# Allegro board sophum_flow_v1.brd
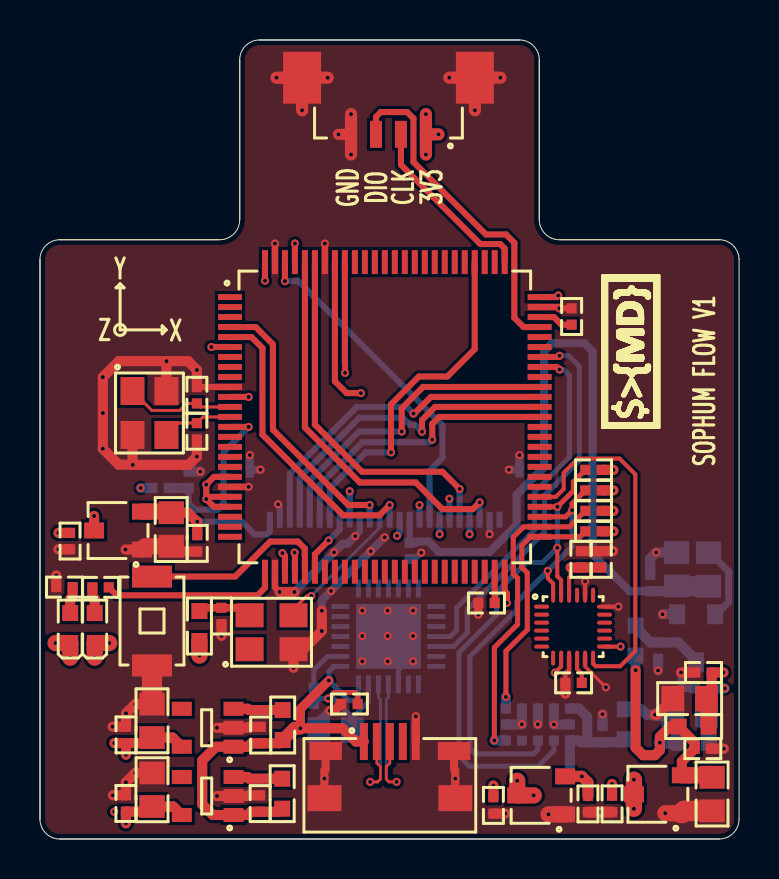
[diagram p0: board, top side]
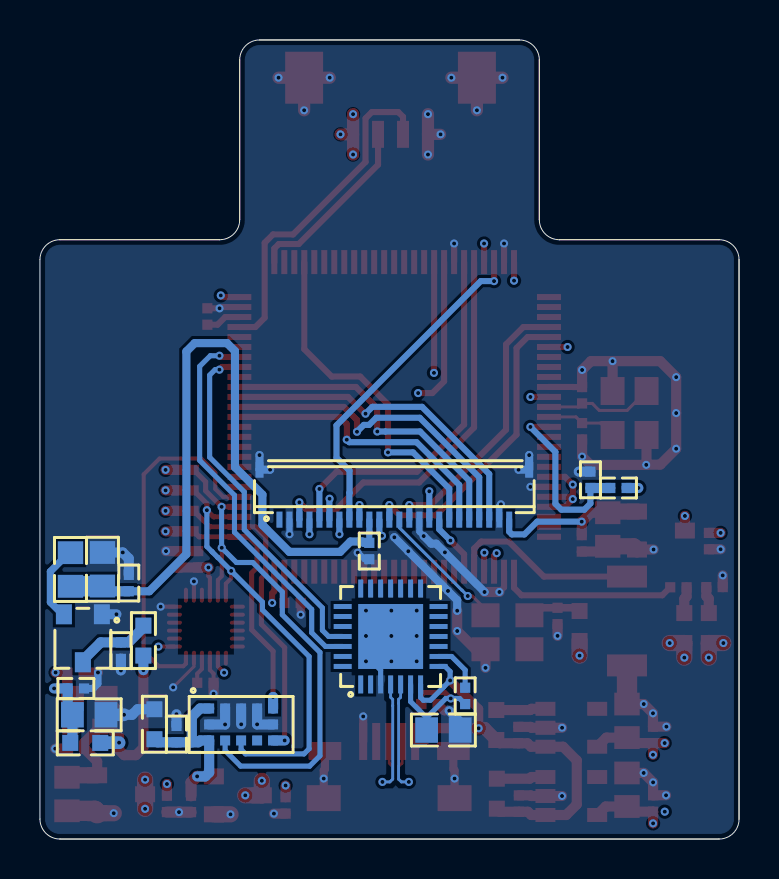
[diagram p1: board, bottom side, seen from below]

Outline 35 x 40 mm; copper layers: TOP, GND02, PWR03, BOTTOM. Coordinates in mm from the lower left corner of the outline.
Outline path: 0,29 0,1 ; 0,29 arc(0.29,29.71) 1,30 ; 0,29 0,1 ; 0,1 arc(0.29,0.29) 1,0 ; 1,30 9,30 ; 1,30 9,30 ; 9,30 arc(9.71,30.29) 10,31 ; 1,0 34,0 ; 1,0 34,0 ; 34,0 arc(34.71,0.29) 35,1 35,29 arc(34.71,29.71) 34,30 ; 10,39 10,31 ; 10,39 arc(10.29,39.71) 11,40 ; 10,39 10,31 ; 11,40 24,40 ; 11,40 24,40 ; 24,40 arc(24.71,39.71) 25,39 ; 25,39 25,31 ; 25,39 25,31 ; 25,31 arc(25.29,30.29) 26,30 ; 26,30 34,30 ; 26,30 34,30

## Design rules (mm)
net group DIFFPAIR0: nets N1010161 N1010165
net group DIFFPAIR1: nets N02244 N02266

## Placement (name value [footprint] x y rotation side)
C1  1uF  [C0402]  22.7 1.68 270 top
C2  1uF  [C0402]  27.44 1.76 270 top
C3  0.1uF  [C0402]  28.16 5.25 90 bottom
C4  4.7uF  [C0603]  29.27 5.75 90 bottom
C5  0.1uF  [C0402]  28.1 14 90 top
C6  0.1uF  [C0402]  27.08 14 90 top
C7  0.1uF  [C0402]  7.44 17.98 90 bottom
C8  0.1uF  [C0402]  26.72 7.82 180 top
C9  0.1uF  [C0402]  22.36 11.82 180 top
C10  0.1uF  [C0402]  26.62 26.16 90 top
C11  22pF  [C0402]  7.86 22.21 90 top
C12  22pF  [C0402]  7.86 20.41 270 top
C13  1uF  [C0402]  15.5 6.76 180 top
C14  10uF  [C0805]  14.8 5.46 180 bottom
C15  0.1uF  [C0402]  11.05 5.2 90 top
C16  0.1uF  [C0402]  4.31 5.21 90 top
C17  10uF  [C0805]  5.61 5.92 90 top
C18  0.1uF  [C0402]  11.02 1.78 90 top
C19  10uF  [C0805]  5.61 2.47 90 top
C20  0.1uF  [C0402]  4.3 1.78 90 top
C21  10uF  [C0805]  31.87 13.51 90 bottom
C22  0.1uF  [C0402]  30.55 12.81 90 bottom
C23  1uF  [C0402]  30.95 9.43 270 bottom
C24  1uF  [C0402]  18.51 14.42 270 bottom
C25  1uF  [C0402]  1.51 14.91 270 top
C26  0.1uF  [C0402]  9.09 11.17 270 top
C27  10uF  [C0805]  6.57 15.49 270 top
C28  0.1uF  [C0402]  7.88 14.8 270 top
C29  1uF  [C0402]  28.64 1.76 270 top
C30  10uF  [C0805]  32.53 7.03 180 top
C31  0.1uF  [C0402]  33.22 8.34 180 top
C32  10uF  [C0805]  33.65 2.25 270 top
C33  0.1uF  [C0402]  33.19 4.52 0 top
C34  10uF  [C0805]  32.53 6.22 180 bottom
C35  0.1uF  [C0402]  33.2 7.54 180 bottom
J1  DEBUG  [DBAR-4-1R25-SM]  17.45 36.69 180 top
J2  USB_MICRO  [USB-MICRO-5-SM]  17.52 3.23 0 top
L1  3.3uH  [L0603]  29.82 9.93 90 bottom
L2  FB-600R  [L0805]  33.47 13.5 270 bottom
L3  3.3uH  [L0603]  7.98 10.66 270 top
L4  3.3uH  [L0603]  32.73 5.63 0 top
L5  3.3uH  [L0603]  32.73 4.81 0 bottom
LED1  POWER  [LED0603]  1.52 10.56 90 top
LED2  STATE  [LED0603]  2.74 10.56 90 top
R1  10K  [R0402]  27.72 15.4 0 top
R2  10K  [R0402]  27.72 16.43 0 top
R3  10K  [R0402]  27.72 17.45 0 top
R4  10K  [R0402]  27.72 18.48 0 top
R5  10K  [R0402]  6.04 17.57 0 bottom
R6  2K  [R0402]  1.23 12.61 180 top
R7  2K  [R0402]  3.04 12.6 0 top
R8  10K  [R0402]  13.71 7.17 90 bottom
R9  500K  [R0603]  12.15 5.71 90 top
R10  500K  [R0603]  12.13 2.27 90 top
SW1  BUTTON  [SW-2-2R00X1R10-SM]  5.61 10.91 90 top
U1  STM32F407VGT6  [LQFP-100-1R20X0R30]  17.27 21.13 270 top
U2  XC6206P282MR  [SOT-23-3-1R00X0R80]  25.09 2.19 180 top
U3  ICM-20948  [QFN-24-0R75X0R20]  26.69 10.63 0 top
U4  VL53L0-1X  [LGA-12-0R50X0R50]  24.93 5.74 180 bottom
U5  CP2102-GM  [QFN-28-0R90X0R25]  17.44 10.14 90 bottom
U6  SPX3819M5-L-3-3  [SOT-23-3-1R00X0R70]  8.4 5.57 90 top
U7  SPX3819M5-L-1-8  [SOT-23-3-1R00X0R70]  8.4 2.15 90 top
U8  XC6206P152MR  [SOT-23-3-1R00X0R80]  32.85 10.05 270 bottom
U9  OV-SENSOR  [FPC-24-0R80X0R30]  17.26 17.24 0 bottom
U10  XC6206P282MR  [SOT-23-3-1R00X0R80]  3.91 15.44 180 top
U11  XC6206P282MR  [SOT-23-3-1R00X0R80]  30.94 2.24 180 top
X1  8Mhz  [XTAL-4-3R20X2R50-SM]  5.48 21.33 270 top
X2  24Mhz  [XTAL-4-3R20X2R50-SM]  11.59 10.35 0 top

## Library data of the parts
C1-C35 = CAPACITOR-NON-POL
J1 = DBAR-4
J2 = USB_MICRO
L1 L3-L5 = INDUCTOR
L2 = MAGNETIC-BEAD
LED1 LED2 = LED
R1-R10 = RESISTOR
SW1 = BUTTON
U1 = STM32F407VGT6
U2 U10 U11 = XC6206P282MR
U3 = ICM-20948
U4 = VL53L0-1X
U5 = CP2102
U6 = SPX3819M5-L-3-3
U7 = SPX3819M5-L-1-8
U8 = XC6206P152MR
U9 = OV-SENSOR
X1 = XTAL-CRY
X2 = XTAL-OSC

## Footprints (pads in the part's own frame, mm; a bottom-side part is the same pattern mirrored in y, then rotated)
C0402
  rect 0.51x0.51 smd: 1(-0.41,0) 2(0.41,0)
C0603
  rect 0.8x0.8 smd: 1(-0.75,0) 2(0.75,0)
C0805
  rect 1.14x1.27 smd: 1(-0.84,0) 2(0.84,0)
DBAR-4-1R25-SM
  rect 0.6x1.35 smd: 1(-1.875,1.418) 2(-0.625,1.418) 3(0.625,1.418) 4(1.875,1.418)
  rect 1.9x2.6 smd: 5(-4.325,-1.418) 6(4.325,-1.418)
FPC-24-0R80X0R30
  rect 0.3x0.8 smd: 1(5.75,1.25) 2(5.25,1.25) 3(4.75,1.25) 4(4.25,1.25) 5(3.75,1.25) 6(3.25,1.25) 7(2.75,1.25) 8(2.25,1.25) 9(1.75,1.25) 10(1.25,1.25) 11(0.75,1.25) 12(0.25,1.25) 13(-0.25,1.25) 14(-0.75,1.25) 15(-1.25,1.25) 16(-1.75,1.25) 17(-2.25,1.25) 18(-2.75,1.25) 19(-3.25,1.25) 20(-3.75,1.25) 21(-4.25,1.25) 22(-4.75,1.25) 23(-5.25,1.25) 24(-5.75,1.25)
  rect 0.4x0.8 smd: 25(-6.75,-1.25) 26(6.75,-1.25)
L0603
  rect 0.8x0.8 smd: 1(-0.75,0) 2(0.75,0)
L0805
  rect 1.14x1.27 smd: 1(-0.84,0) 2(0.84,0)
LED0603
  rect 0.8x0.8 smd: 1(-0.75,0) 2(0.75,0)
LGA-12-0R50X0R50
  rect 0.5x0.5 smd: 1(-1.6,0.8) 2(-0.8,0.8) 3(0,0.8) 4(0.8,0.8) 5(1.6,0.8) 6(1.6,0) 7(1.6,-0.8) 8(0.8,-0.8) 9(0,-0.8) 10(-0.8,-0.8) 11(-1.6,-0.8) 12(-1.6,0)
LQFP-100-1R20X0R30
  rect 0.3x1.2 smd: 1(-6,-7.75) 2(-5.5,-7.75) 3(-5,-7.75) 4(-4.5,-7.75) 5(-4,-7.75) 6(-3.5,-7.75) 7(-3,-7.75) 8(-2.5,-7.75) 9(-2,-7.75) 10(-1.5,-7.75) 11(-1,-7.75) 12(-0.5,-7.75) 13(0,-7.75) 14(0.5,-7.75) 15(1,-7.75) 16(1.5,-7.75) 17(2,-7.75) 18(2.5,-7.75) 19(3,-7.75) 20(3.5,-7.75) 21(4,-7.75) 22(4.5,-7.75) 23(5,-7.75) 24(5.5,-7.75) 25(6,-7.75) 51(6,7.75) 52(5.5,7.75) 53(5,7.75) 54(4.5,7.75) 55(4,7.75) 56(3.5,7.75) 57(3,7.75) 58(2.5,7.75) 59(2,7.75) 60(1.5,7.75) 61(1,7.75) 62(0.5,7.75) 63(0,7.75) 64(-0.5,7.75) 65(-1,7.75) 66(-1.5,7.75) 67(-2,7.75) 68(-2.5,7.75) 69(-3,7.75) 70(-3.5,7.75) 71(-4,7.75) 72(-4.5,7.75) 73(-5,7.75) 74(-5.5,7.75) 75(-6,7.75)
  rect 1.2x0.3 smd: 26(7.75,-6) 27(7.75,-5.5) 28(7.75,-5) 29(7.75,-4.5) 30(7.75,-4) 31(7.75,-3.5) 32(7.75,-3) 33(7.75,-2.5) 34(7.75,-2) 35(7.75,-1.5) 36(7.75,-1) 37(7.75,-0.5) 38(7.75,0) 39(7.75,0.5) 40(7.75,1) 41(7.75,1.5) 42(7.75,2) 43(7.75,2.5) 44(7.75,3) 45(7.75,3.5) 46(7.75,4) 47(7.75,4.5) 48(7.75,5) 49(7.75,5.5) 50(7.75,6) 76(-7.75,6) 77(-7.75,5.5) 78(-7.75,5) 79(-7.75,4.5) 80(-7.75,4) 81(-7.75,3.5) 82(-7.75,3) 83(-7.75,2.5) 84(-7.75,2) 85(-7.75,1.5) 86(-7.75,1) 87(-7.75,0.5) 88(-7.75,0) 89(-7.75,-0.5) 90(-7.75,-1) 91(-7.75,-1.5) 92(-7.75,-2) 93(-7.75,-2.5) 94(-7.75,-3) 95(-7.75,-3.5) 96(-7.75,-4) 97(-7.75,-4.5) 98(-7.75,-5) 99(-7.75,-5.5) 100(-7.75,-6)
QFN-24-0R75X0R20
  oval 0.75x0.2 smd: 1(-1.575,1) 2(-1.575,0.6) 3(-1.575,0.2) 4(-1.575,-0.2) 5(-1.575,-0.6) 6(-1.575,-1) 13(1.575,-1) 14(1.575,-0.6) 15(1.575,-0.2) 16(1.575,0.2) 17(1.575,0.6) 18(1.575,1)
  oval 0.2x0.75 smd: 7(-1,-1.575) 8(-0.6,-1.575) 9(-0.2,-1.575) 10(0.2,-1.575) 11(0.6,-1.575) 12(1,-1.575) 19(1,1.575) 20(0.6,1.575) 21(0.2,1.575) 22(-0.2,1.575) 23(-0.6,1.575) 24(-1,1.575)
QFN-28-0R90X0R25
  rect 0.9x0.25 smd: 1(-2.4,1.5) 2(-2.4,1) 3(-2.4,0.5) 4(-2.4,0) 5(-2.4,-0.5) 6(-2.4,-1) 7(-2.4,-1.5) 15(2.4,-1.5) 16(2.4,-1) 17(2.4,-0.5) 18(2.4,0) 19(2.4,0.5) 20(2.4,1) 21(2.4,1.5)
  rect 0.25x0.9 smd: 8(-1.5,-2.4) 9(-1,-2.4) 10(-0.5,-2.4) 11(0,-2.4) 12(0.5,-2.4) 13(1,-2.4) 14(1.5,-2.4) 22(1.5,2.4) 23(1,2.4) 24(0.5,2.4) 25(0,2.4) 26(-0.5,2.4) 27(-1,2.4) 28(-1.5,2.4)
  rect 3.25x3.25 smd: 29(0,0)
R0402
  rect 0.51x0.51 smd: 1(-0.41,0) 2(0.41,0)
R0603
  rect 0.8x0.8 smd: 1(-0.75,0) 2(0.75,0)
SOT-23-3-1R00X0R70
  rect 0.7x1 smd: 1(-0.95,-1.295) 2(0,-1.295) 3(0.95,-1.295) 4(0.95,1.295) 5(-0.95,1.295)
SOT-23-3-1R00X0R80
  rect 1x0.8 smd: 1(-1.2,0.95) 2(-1.2,-0.95) 3(1.2,0)
SW-2-2R00X1R10-SM
  rect 1.1x2 smd: 1(-2.225,0) 2(2.225,0)
USB-MICRO-5-SM
  rect 0.4x1.85 smd: 1(-1.3,1.655) 2(-0.65,1.655) 3(0,1.655) 4(0.65,1.655) 5(1.3,1.655)
  rect 1.63x0.9 smd: 6(-3.215,1.18) 7(3.215,1.18)
  rect 1.7x1.3 smd: 8(-3.275,-1.18) 9(3.275,-1.18)
XTAL-4-3R20X2R50-SM
  rect 1.4x1.2 smd: 1(-1.1,-0.85) 2(1.1,-0.85) 3(1.1,0.85) 4(-1.1,0.85)

## Nets
GND: C1.2 C2.2 C3.2 C4.2 C5.2 C6.2 C7.2 C8.2 C9.2 C10.2 C11.2 C12.2 C13.2 C14.2 C15.2 C16.2 C17.2 C18.2 C19.2 C20.2 C21.2 C22.2 C23.2 C24.2 C25.2 C26.2 C27.2 C28.2 C29.2 C30.2 C31.2 C32.2 C33.2 C34.2 C35.2 J1.4 J1.5 J1.6 J2.5(GND) J2.6(SH1) J2.7(SH2) J2.8(SH3) J2.9(SH4) R6.2 SW1.1(P1) U1.10(VSS_5) U1.20(VREF-) U1.27(VSS_4) U1.74(VSS_2) U1.94(BOOT0/VPP) U1.99(VSS_3) U2.1(VSS) U3.9(SDO/AD0) U3.11(FSYNC) U3.18(GND) U3.20(RESV1) U4.2(AVSSVCSEL) U4.3(GND) U4.4(GND2) U4.6(GND3) U4.12(GND4) U5.3(GND#3) U5.29(GND#29) U6.2(GND) U7.2(GND) U8.1(VSS) U9.2(AGND) U9.15(DGND#15) U9.23(AF-GND) U9.25(DGND#25) U9.26(DGND#26) U10.1(VSS) U11.1(VSS) X1.2(GND#2) X1.4(GND#4) X2.2(GND)
VCC_1V8: C5.1 C6.1 C19.1 C20.1 R1.2 R2.2 R3.2 R4.2 U3.8(VDDIO) U3.13(VDD) U3.22(NCS) U7.5(VOUT)
VCC_2V8: C2.1 C3.1 C4.1 U2.2(VOUT) U4.1(AVDDVCSEL) U4.11(AVDD)
VCC_3V3: C1.1 C16.1 C17.1 C25.1 C29.1 J1.1 L3.2 LED1.1 LED2.1 R5.1 U1.6(VBAT) U1.11(VDD_5) U1.19(VDD) U1.21(VREF+) U1.22(VDDA) U1.28(VDD_4) U1.50(VDD_1) U1.75(VDD_2) U1.100(VDD_3) U2.3(VIN) U6.5(VOUT) U10.3(VIN) U11.3(VIN)
VCC_5V0: C15.1 C18.1 J2.1(VCC) R9.1 R10.1 U5.7(REGIN) U5.8(VBUS) U6.1(VIN) U7.1(VIN)
KEY: SW1.2(P2) U1.30(PA5/SPI1_SCK/OTG_HS_ULPI_CK/ADC)
LED: R7.2 U1.26(PA3/USART2_RX/OTG_HS_ULPI_D0/AD)
OV_AF_VCC: C27.1 C28.1 U9.24(AF-VCC) U10.2(VOUT)
OV_AVDD: C30.1 C31.1 L4.2 U9.4(AVDD)
OV_DOVDD: C34.1 C35.1 L5.2 U9.11(DOVDD)
OV_VCC_1V5: C21.1 C22.1 C24.1 L2.2 U9.10(DVDD)
OV_VCC_2V8: C32.1 C33.1 L1.1 L4.1 L5.1 U11.2(VOUT)
OV_XCLK: U9.13(XCLK) X2.3(OUT)
SENSOR_IMU_INT: U1.55(FSMC_D13/USART3_TX/PD8) U3.12(INT1)
SENSOR_OV_D0: U1.63(I2S2_MCK/SDIO_D6/USART6_TX/DCMI) U9.19(Y2)
SENSOR_OV_D1: U1.64(I2S3_MCK/SDIO_D7/USART6_RX/DCMI) U9.21(Y3)
SENSOR_OV_D2: U1.65(SDIO_D0/DCMI_D2/PC8) U9.22(Y4)
SENSOR_OV_D3: U1.66(I2S_CKIN/MCO2/SDIO_D1/I2C3_SDA/) U9.20(Y5)
SENSOR_OV_D4: U1.79(UART4_RX/SPI3_MISO/SDIO_D3/DCMI) U9.18(Y6)
SENSOR_OV_D5: U1.92(PB6/I2C1_SCL/CAN2_TX/OTG_FS_INT) U9.16(Y7)
SENSOR_OV_D6: U1.4(TRACED2/FSMC_A21/DCMI_D6/PE5) U9.14(Y8)
SENSOR_OV_D7: U1.5(TRACED3/FSMC_A22/DCMI_D7/PE6) U9.12(Y9)
SENSOR_OV_HREF: U1.29(PA4/DCMI_HSYNC/OTG_HS_SOF/I2S3_) U9.9(HREF)
SENSOR_OV_PCLK: U1.31(PA6/SPI1_MISO/DCMI_PIXCLK/ADC12) U9.17(PCLK)
SENSOR_OV_PWDN: U1.98(FSMC_NBL1/DCMI_D3/PE1) U9.8(PWDN)
SENSOR_OV_RESET: U1.97(FSMC_NBL0/DCMI_D2/PE0) U9.6(RESET)
SENSOR_OV_SCL: U1.95(PB8/SDIO_D4/DCMI_D6/OTG_FS_SCL/) U9.5(SIO_C)
SENSOR_OV_SDA: U1.96(PB9/I2S2_WS/OTG_FS_SDA/SDIO_D5/) U9.3(SIO_D)
SENSOR_OV_VSYNC: U1.93(PB7/I2C1_SDA/FSMC_NL/DCMI_VSYNC) U9.7(VSYNC)
SENSOR_SCL: R4.1 U1.54(PB15/SPI2_MOSI/I2S2_SD/OTG_HS_D) U3.23(SCL/SCLK) U4.10(SCL)
SENSOR_SDA: R3.1 U1.53(PB14/SPI2_MISO/OTG_HS_DMUSART3_) U3.24(SDA/SDI) U4.9(SDA)
SENSOR_VL_INT: R2.1 U1.52(PB13/SPI2_SCK/I2S2_CK/CAN2_TX/E) U4.7(GPIO1)
SENSOR_VL_XSH: R1.1 U1.51(PB12/I2S2_WS/I2S2_SMBA/CAN2_RX/) U4.5(XSHUT)
SWCLK: J1.2 U1.76(PA14/JTCK/SWCLK)
SWDIO: J1.3 U1.72(PA13/JTMS/SWDIO)
USART1_RX: U1.69(PA10/USART1_RX/OTG_FS_ID/DCMI_D) U5.26(TXD)
USART1_TX: U1.68(PA9/USART1_TX/I2C3_SMBA/DCMI_D0) U5.25(RXD)
N01190: C7.1 R5.2 U1.14(NRST)
N01562: C10.1 U1.73(VCAP2)
N01566: C9.1 U1.49(VCAP1)
N02244: C11.1 U1.12(PH0/OSC_IN) X1.1(OUT1)
N02266: C12.1 U1.13(PH1/OSC_OUT) X1.3(OUT2)
N920628: C8.1 U3.10(REGOUT)
N1008580: C26.1 L3.1 X2.4(VDD)
N1008850: C23.1 L1.2 U8.3(VIN)
N1009244: L2.1 U8.2(VOUT)
N1010161: J2.2(D-) U5.5(D-)
N1010165: J2.3(D+) U5.4(D+)
N1010307: R8.2 U5.9(R\S\T\)
N1010387: C13.1 C14.1 R8.1 U5.6(VDD)
N1014561: LED2.2 R7.1
N1015275: LED1.2 R6.1
N1041543: R10.2 U7.3(EN)
N1044127: R9.2 U6.3(EN)

Pads without a net: J2 4; U1 1 2 3 7 8 9 15 16 17 18 23 24 25 32 33 34 35 36 37 38 39 40 41 42 43 44 45 46 47 48 56 57 58 59 60 61 62 67 70 71 77 78 80 81 82 83 84 85 86 87 88 89 90 91; U3 1 2 3 4 5 6 7 14 15 16 17 19 21; U4 8; U5 1 2 10 11 12 13 14 15 16 17 18 19 20 21 22 23 24 27 28; U6 4; U7 4; U9 1; X2 1

## Via types
v1: diameter 0.406, hole 0.203, TOP to BOTTOM, 161 vias

## Routing (per net, layer and track width the routed paths; a pad name or vN(x,y) marks a point on that pad's centre or on a via; arc(x,y) is an arc through that point)
GND: length 110.9
  TOP w0.152: v1(28.33,7.59) 27.29,8.63 U3.11
  TOP w0.203: U3.9 26.49,8.46 26.31,8.28 C8.2 ; U3.20 v1(27.29,12.9) ; U3.18 v1(28.96,11.63)
  TOP w0.305: C11.2 8.32,22.62 8.32,22.63 U1.10 ; v1(12,12.37) 11.77,12.6 U1.27 ; C10.2 v1(26.01,26.57) 25.94,26.63 U1.74 ; U1.99 v1(11.77,29.81) ; U1.20 v1(10.45,17.63) ; U1.94 v1(14.27,29.81)
  TOP w0.406: J2.8 v1(14.24,3.03) 14.24,3.43 14.3,3.49 J2.6 ; J2.7 20.73,3.49 20.79,3.43 v1(20.79,3.03) J2.9 ; J2.5 v1(18.82,6.14) ; C9.2 v1(21.95,11.23)
  TOP w0.457: C13.2 14.75,6.42 v1(14.51,6.42)
  TOP w0.508: v1(12.69,8.57) X2.2 13.2,9.5 v1(14.11,10.41) v1(14.11,11.43) ; C31.2 v1(32.1,8.34) ; v1(8.86,2.15) U7.2 10.4,2.15 10.43,2.19 C18.2 ; v1(3.64,5.62) C16.2 v1(4.31,6.3) v1(4.77,6.76) C17.2 ; C26.2 v1(9.09,10.17) ; U10.1 v1(4.28,14.49) ; v1(8.86,5.57) U6.2 10.39,5.57 10.44,5.61 C15.2 ; C1.2 v1(23.29,1.27) ; C27.2 6.84,14.39 C28.2 ; v1(12.74,12.37) v1(12,12.37) ; v1(6.33,23.92) 7.42,23.92 v1(7.86,23.48) C11.2 ; v1(6.33,23.92) 3.95,23.92 v1(3.15,23.12) v1(3.15,21.32) v1(3.15,19.54) 3.94,18.74 4.63,18.74 ; v1(6.33,23.92) 6.33,23.86 X1.4 ; v1(3.66,2.19) C20.2 v1(4.3,2.84) v1(4.77,3.31) C19.2 ; v1(28.69,14.41) C5.2 C6.2 ; C8.2 v1(26.31,7.27) ; v1(30.79,6.22) 30.88,6.22 C30.2 ; R6.2 v1(0.82,13.2) ; 4.63,18.74 v1(4.65,18.73) 7.44,18.73 v1(7.86,19.15) C12.2 ; 4.63,18.74 X1.2 ; C25.2 v1(0.92,14.5) ; C33.2 v1(34.24,4.52)
  TOP w0.559: C2.2 v1(28.04,1.35) 28.04,1.35 C29.2 ; J1.4 v1(14.94,35.28)
  TOP w0.61: v1(15.57,34.26) J1.4 v1(15.57,36.29) ; J1.5 v1(21.77,36.48) ; J1.5 v1(23.05,38.11) ; J1.5 v1(20.49,38.11) ; J1.6 v1(13.12,36.48) ; J1.6 v1(14.4,38.11) ; J1.6 v1(11.84,38.11)
  TOP w0.813: U11.1 v1(31.31,1.29) ; U10.1 5.27,14.65 C27.2 ; U2.1 v1(25.46,1.24)
  TOP w1.016: C32.2 32.26,1.41 U11.1 ; C17.2 SW1.1
  BOTTOM w0.152: v1(24.93,5.74) 24.93,5.75 ; v1(25.73,5.74) 25.73,5.74
  BOTTOM w0.254: U5.3 17.94,8.46 18.38,8.9 v1(18.68,8.9)
  BOTTOM w0.305: U9.15 16.01,15.39 v1(15.79,15.16) ; U9.2 v1(22.51,15.26) ; C24.2 18.75,14.01 19.07,14.33 v1(19.09,14.33) ; U9.23 12.01,16.67 v1(11.92,16.76) ; v1(24.13,5.74) 24.12,5.74
  BOTTOM w0.356: C35.2 32.33,7.54 32.1,7.78 32.1,8.34 v1(32.1,8.34)
  BOTTOM w0.406: v1(23.48,18.49) U9.26 v1(24.01,19.22) ; v1(17.26,15.11) v1(16.56,14.41) v1(14.57,12.42) 14.11,11.96 v1(14.11,11.43) ; v1(10.51,19.22) U9.25 v1(11.04,18.49) ; v1(15.79,15.16) 15.41,14.79 15.16,14.79 v1(14.73,14.35) v1(12.74,12.37)
  BOTTOM w0.457: v1(14.51,6.42) 13.96,5.87 C14.2
  BOTTOM w0.508: U4.12 v1(25.73,5.74) ; 24.93,5.75 U4.3 ; C7.2 v1(8.03,18.39) ; U4.4 v1(24.13,5.74) ; 25.73,5.74 U4.2 ; C22.2 30.55,14.04 v1(30.85,14.35) C21.2 ; U8.1 v1(31.17,11.25) ; C3.2 v1(28.16,6.25) ; 24.12,5.74 U4.6 ; C4.2 30.11,6.5 30.39,6.22 v1(30.79,6.22) ; C23.2 v1(30.95,8.44)
  BOTTOM w0.635: C34.2 v1(30.79,6.22)
  vias: v1(16.14,11.44) v1(16.14,10.17) v1(16.14,8.9) v1(17.41,11.44) v1(17.41,10.17) v1(17.41,8.9) v1(18.68,11.44) v1(18.68,10.17)
VCC_1V8: length 67.4
  TOP w0.203: U3.13 v1(29.07,9.63) ; v1(26.57,13.59) 26.57,13.16 26.49,13.09 U3.22 ; v1(25.78,8.33) 26.09,8.64 U3.8
  TOP w0.508: R3.2 v1(28.71,17.45) ; R4.2 v1(28.71,18.48) ; R2.2 v1(28.71,16.43) ; C5.1 C6.1 v1(26.57,13.59) ; U7.5 6.68,1.63 C19.1 5.35,1.37 C20.1 v1(4.3,0.79) ; R1.2 v1(28.71,15.4)
  PWR03 w0.508: v1(28.71,18.48) v1(28.71,17.45) v1(28.71,16.43) v1(28.71,15.4) 28.28,14.97 27.07,14.97 26.57,14.46 v1(26.57,13.59) 28.94,13.59 29.93,12.6 29.93,10.49 v1(29.07,9.63) 29.07,9.05 28.35,8.33 v1(25.78,8.33) 25.2,8.33 24.67,7.8 24.67,7.09 25.25,6.5 26.31,6.5 29.12,3.7 29.96,3.7 30.64,3.01 30.64,1.17 30.06,0.59 5.08,0.59 4.89,0.79 v1(4.3,0.79) v1(3.72,1.37)
VCC_2V8: length 9.4
  TOP w0.559: U2.2 v1(27.13,3.14) 27.44,2.83 C2.1
  BOTTOM w0.508: C4.1 29.12,4.84 C3.1 27.4,4.84 ; U4.1 26.98,6.54 27.4,6.12 27.4,4.84 ; 27.4,4.84 27.07,4.84 26.98,4.94 U4.11 26.53,3.33 26.72,3.14 v1(27.13,3.14)
VCC_3V3: length 27.7
  TOP w0.305: U1.21 8.44,17.13 v1(8.32,17.02) ; v1(23.38,11.82) 23.38,12.3 23.27,12.41 U1.50 ; v1(8.32,17.02) 8.71,16.63 U1.22 ; v1(8.32,17.02) v1(8.32,17.74) 8.71,18.13 U1.19 ; U1.6 v1(8.59,24.63) ; U1.75 25.86,27.13 25.94,27.21 v1(25.95,27.21) ; U1.100 v1(11.27,27.95) ; v1(12.14,14.31) 12.14,14.31 12.27,14.18 U1.28 ; U1.11 v1(10.45,22.13)
  TOP w0.508: C16.1 v1(4.31,4.22) ; C16.1 v1(3.72,4.8) ; C16.1 5.34,4.8 C17.1 6.64,5.08 U6.5 ; U10.3 v1(2.71,16.17) ; C1.1 v1(22.7,2.68) ; C25.1 v1(0.92,15.32) ; C29.1 v1(28.64,2.76)
  TOP w0.61: J1.1 v1(19.32,36.29) ; J1.1 v1(19.95,35.28) ; J1.1 v1(19.32,34.26)
  TOP w0.813: v1(2.74,9.08) LED2.1 v1(3.47,9.81) ; v1(24.72,2.19) U2.3 v1(23.89,2.92) ; L3.2 v1(7.98,9.18) ; v1(0.78,9.81) LED1.1 v1(1.52,9.08) ; v1(29.74,1.51) U11.3 v1(29.74,2.97)
  BOTTOM w0.508: R5.1 v1(5.04,17.57)
VCC_5V0: length 22.3
  TOP w0.457: v1(13.04,5.54) 13.04,6.51 v1(14.46,7.94)
  TOP w0.508: v1(13.04,5.54) 15.15,5.54 15.81,4.88 J2.1 ; R9.1 11.99,4.79 C15.1 10.59,4.79 10.42,4.62 U6.1 8.81,4.62 8.12,3.93 8.12,1.73 8.65,1.2 U7.1 10.41,1.2 10.57,1.37 C18.1 11.97,1.37 R10.1
  TOP w0.635: R9.1 12.74,5.54 v1(13.04,5.54)
  BOTTOM w0.254: U5.7 15.94,7.09 15.8,6.95 15.45,6.95 14.79,7.61 14.79,7.61 v1(14.46,7.94) 14.46,8.39 14.72,8.64 U5.8
KEY: length 9.7
  TOP w0.305: SW1.2 9.77,13.14 11.53,14.89 12.9,14.89 12.95,14.85 12.96,14.85 13.26,14.55 13.26,14.54 13.26,14.54 13.26,14.19 13.27,14.18 U1.30
LED: length 8.9
  TOP w0.305: U1.26 11.27,12.58 10.89,12.2 3.85,12.2 R7.2
OV_AF_VCC: length 8.2
  TOP w0.508: C27.1 7.41,16.33 7.86,15.89 v1(7.88,15.89) C28.1
  TOP w0.813: U10.2 6.51,16.39 C27.1
  BOTTOM w0.305: v1(7.88,15.89) 10.11,15.89 10.75,15.25 11.37,15.25 11.51,15.39 U9.24
OV_AVDD: length 28.9
  TOP w0.508: C30.1 33.63,7.3 C31.1 v1(34.22,8.34)
  TOP w0.813: L4.2 33.48,6.92 C30.1
  PWR03 w0.508: v1(34.22,8.34) 34.22,16.91 30.89,20.24 26.49,20.24 v1(21.51,15.26)
  BOTTOM w0.305: U9.4 v1(21.51,15.26)
OV_DOVDD: length 34.8
  PWR03 w0.457: v1(34.29,7.54) 33.73,7.54 33.19,8.09 33.19,16.26 30.12,19.32 27.4,19.32 24.75,16.68 24.75,15.48 22.61,13.34 19.05,13.34 17.88,14.51 v1(17.88,15.18)
  BOTTOM w0.305: U9.11 18.01,15.31 v1(17.88,15.18)
  BOTTOM w0.508: L5.2 33.37,4.92 C34.1 33.61,6.46 C35.1 v1(34.29,7.54)
OV_VCC_1V5: length 36.2
  BOTTOM w0.305: C24.1 18.51,15.38 18.51,15.39 U9.10
  BOTTOM w0.406: C22.1 29.52,12.4 27.67,14.26 27.67,24.41 27.25,24.82 25.63,24.82 25.24,24.43 25.24,18.61 23.86,17.24 23.86,15.73 22.51,14.37 19.97,14.37 19.45,14.89 18.86,14.89 18.79,14.83 C24.1
  BOTTOM w0.508: C21.1 31.61,12.4 C22.1
  BOTTOM w1.016: C21.1 31.88,12.66 L2.2
OV_VCC_2V8: length 13.4
  TOP w0.508: U11.2 32.14,3.88 C33.1 32.78,4.83 L4.1 31.55,5.63 31.04,5.12 v1(31.04,4.82) 31.04,4.45 30.78,4.2 30.2,4.2 29.82,4.57 v1(29.82,8.45)
  TOP w0.813: C32.1 33.55,3.19 U11.2
  BOTTOM w0.508: L1.1 v1(29.82,8.45)
  BOTTOM w0.635: v1(31.04,4.82) 31.97,4.82 L5.1
OV_XCLK: length 6.7
  TOP w0.152: v1(13.58,12.17) 13.36,12.17 12.69,11.5 X2.3
  BOTTOM w0.152: v1(13.58,12.17) 13.87,12.45 13.87,12.45 17.01,15.59 U9.13
SENSOR_IMU_INT: length 18
  TOP w0.203: U3.12 27.69,8.78 27.82,8.65 29.05,8.65 29.81,9.4 29.81,18.25 29.02,19.04 26.93,19.04 26.22,18.34 26.22,17.52 25.83,17.13 U1.55
SENSOR_OV_D0: length 14.6
  TOP w0.305: v1(19.64,19.99) 19.64,20.78 19.99,21.13 U1.63
  BOTTOM w0.305: U9.19 14.01,17.73 16.15,19.87 19.52,19.87 v1(19.64,19.99)
SENSOR_OV_D1: length 16.5
  TOP w0.305: v1(19.13,20.39) 19.13,20.98 19.78,21.63 U1.64
  BOTTOM w0.305: U9.21 13.01,18.11 15.99,21.09 18.17,21.09 18.52,20.73 18.79,20.73 v1(19.13,20.39)
SENSOR_OV_D2: length 16.7
  TOP w0.305: U1.65 19.57,22.13 18.74,21.29 v1(18.7,21.29)
  BOTTOM w0.305: v1(18.7,21.29) 18.36,21.63 15.87,21.63 12.51,18.27 U9.22
SENSOR_OV_D3: length 16.1
  TOP w0.305: U1.66 19.18,22.63 18.11,21.56 v1(18.11,20.4)
  BOTTOM w0.305: U9.20 13.51,17.94 15.97,20.4 17.7,20.4 17.71,20.4 v1(18.11,20.4)
SENSOR_OV_D4: length 17.5
  TOP w0.305: U1.79 21.77,24.52 20.39,23.15 18.97,23.15 17.58,21.76 v1(17.58,19.35)
  BOTTOM w0.305: U9.18 14.51,17.54 16.32,19.35 v1(17.58,19.35)
SENSOR_OV_D5: length 13
  TOP w0.305: v1(15.27,23.33) 15.27,23.82 15.27,23.83 U1.92
  PWR03 w0.305: v1(15.51,17.41) 15.51,21.49 15.27,21.72 v1(15.27,23.33)
  BOTTOM w0.305: U9.16 v1(15.51,17.41)
SENSOR_OV_D6: length 13.9
  TOP w0.305: v1(16.51,16.72) 15.44,16.72 11.66,20.49 11.66,24.76 10.8,25.63 U1.4
  BOTTOM w0.305: U9.14 v1(16.51,16.72)
SENSOR_OV_D7: length 15.2
  TOP w0.305: v1(17.51,16.72) 16.99,16.21 15.18,16.21 11.14,20.24 11.14,24.58 10.59,25.13 U1.5
  BOTTOM w0.305: U9.12 v1(17.51,16.72)
SENSOR_OV_HREF: length 8.9
  TOP w0.305: U1.29 12.77,14.32 12.75,14.34 v1(12.75,14.34)
  PWR03 w0.305: v1(12.75,14.34) 14.3,15.89 18.17,15.89 v1(19,16.72)
  BOTTOM w0.305: U9.9 19.01,16.71 v1(19,16.72)
SENSOR_OV_PCLK: length 3.1
  TOP w0.305: v1(14.45,14.94) 13.77,14.26 U1.31
  BOTTOM w0.305: v1(14.45,14.94) 15.01,15.5 U9.17
SENSOR_OV_PWDN: length 16.8
  TOP w0.305: U1.98 v1(12.27,27.93)
  BOTTOM w0.305: U9.8 19.51,16.67 19.51,16.67 19.51,17.33 19.5,17.34 19.5,18.44 20.15,19.09 20.15,20.71 12.93,27.93 v1(12.27,27.93)
SENSOR_OV_RESET: length 18
  TOP w0.305: U1.97 v1(12.77,29.81)
  PWR03 w0.305: v1(20.5,17.04) 20.5,17.52 20.49,17.53 20.49,22.08 v1(12.77,29.81)
  BOTTOM w0.305: U9.6 20.51,17.03 v1(20.5,17.04)
SENSOR_OV_SCL: length 18.2
  TOP w0.305: U1.95 13.77,20.75 16.13,18.38 20.15,18.38 v1(21.01,17.53)
  BOTTOM w0.305: U9.5 v1(21.01,17.53)
SENSOR_OV_SDA: length 19.7
  TOP w0.305: U1.96 13.27,20.6 16.02,17.85 18.81,17.85 20.15,16.51 21.67,16.51 v1(22.01,16.86)
  BOTTOM w0.305: v1(22.01,16.86) 22.01,15.99 U9.3
SENSOR_OV_VSYNC: length 18
  TOP w0.305: v1(16.07,22.32) 15.35,22.32 14.77,22.91 U1.93
  PWR03 w0.305: v1(20.01,15.26) 20.01,16.69 18.95,17.75 17.13,17.75 16.28,18.6 16.28,22.11 v1(16.07,22.32)
  BOTTOM w0.305: U9.7 v1(20.01,15.26)
SENSOR_SCL: length 26.5
  TOP w0.203: U3.23 26.09,12.96 25.9,13.16 v1(25.9,14.58)
  TOP w0.254: U1.54 v1(25.91,16.63) 26.7,17.43 26.7,17.88 R4.1
  BOTTOM w0.254: v1(25.91,16.63) 25.91,14.61 25.9,14.61 v1(25.9,14.58) 25.16,13.84 24.34,13.84 22.87,12.36 22.87,11.23 20.98,9.34 20.98,4.17 21.5,3.65 24.95,3.65 25.73,4.43 U4.10
SENSOR_SDA: length 22.5
  TOP w0.203: v1(25.42,13.42) 25.43,13.42 25.43,13.05 25.69,12.79 U3.24
  TOP w0.254: U1.53 26.31,16.13 v1(26.64,16.46) 26.64,16.79 R3.1
  BOTTOM w0.254: v1(26.64,16.46) 26.64,14.64 26.38,14.38 26.38,14.38 26.1,14.1 26.1,14.1 v1(25.42,13.42) 23.86,11.86 23.86,11.47 21.53,9.14 21.53,4.52 21.78,4.26 24.71,4.26 24.93,4.48 U4.9
SENSOR_VL_INT: length 15.5
  TOP w0.254: v1(22.75,4.94) 22.75,9.59 23.91,10.75 23.91,13.06 23.7,13.27 23.7,13.56 23.7,13.56 23.7,15.11 24.21,15.63 U1.52 26.51,15.63 R2.1
  BOTTOM w0.508: U4.7 v1(22.75,4.94)
SENSOR_VL_XSH: length 12.2
  TOP w0.254: R1.1 27.03,15.13 U1.51 24.57,15.13 24.12,14.69 24.12,13.6 24.4,13.33 24.4,10.48 23.33,9.41 v1(23.33,7.12)
  BOTTOM w0.508: U4.5 v1(23.33,7.12)
SWCLK: length 9.1
  TOP w0.305: U1.76 23.27,29.56 23.04,29.79 22.04,29.79 18.07,33.75 J1.2
SWDIO: length 17.1
  TOP w0.305: U1.72 24.21,25.63 23.75,26.09 23.75,29.85 23.33,30.26 22.33,30.26 18.7,33.89 18.7,36.07 18.38,36.39 17.06,36.39 16.82,36.15 J1.3
USART1_RX: length 19.7
  TOP w0.305: U1.69 25.95,24.13 v1(26.01,24.19)
  BOTTOM w0.254: U5.26 20.7,9.64 21.4,10.33 21.4,11.5 25.26,15.36 25.26,17.21 27,18.95 27,23.66 26.47,24.19 v1(26.01,24.19)
USART1_TX: length 17.9
  TOP w0.305: U1.68 25.88,23.63 v1(26.01,23.5)
  BOTTOM w0.254: U5.25 20.55,10.14 20.86,10.45 20.86,11.57 24.77,15.48 24.77,17.38 26.5,19.11 26.5,23.22 26.23,23.5 v1(26.01,23.5)
N01190: length 9.1
  TOP w0.305: U1.14 v1(10.45,20.63)
  BOTTOM w0.305: v1(10.45,20.63) 9.2,19.38 9.2,16.78 8.9,16.49 7.75,16.49 7.44,16.79 C7.1
  BOTTOM w0.508: R5.2 C7.1
N01562: length 1.8
  TOP w0.305: U1.73 25.73,26.13 26.11,25.75 C10.1
N01566: length 1.6
  TOP w0.305: U1.49 C9.1
N02244: length 5.5
  TOP w0.152: U1.12 8.03,21.63 C11.1 7.35,21.8 7,21.46 5.6,21.46 X1.1
N02266: length 3.6
  TOP w0.152: U1.13 8.17,21.13 C12.1 6.93,20.82 X1.3
N920628: length 1.3
  TOP w0.203: U3.10 26.89,8.51 27.13,8.28 C8.1
N1008580: length 2.7
  TOP w0.381: L3.1 8.15,11.58 C26.1 10.12,11.58 X2.4
N1008850: length 3.9
  BOTTOM w0.508: U8.3 32.85,8.95 31.96,9.84 C23.1 30.56,9.84 29.82,10.59 L1.2
N1009244: length 3.9
  BOTTOM w0.356: L2.1 33.54,14.33 34.48,13.39 34.48,11.85 33.88,11.25 U8.2
N1010161: length 7.9
  TOP w0.141: J2.2 16.87,3.8 17.05,3.62 17.05,3.42 17.05,3 16.9,2.86 v1(16.53,2.86)
  BOTTOM w0.141: v1(16.53,2.86) 16.9,2.86 17.05,3 17.05,6.79 17.05,6.79 17.05,6.99 16.94,7.1 U5.5
N1010165: length 7.9
  TOP w0.141: J2.3 17.52,3.8 17.34,3.62 17.34,3.55 17.34,3 17.48,2.86 v1(17.85,2.86)
  BOTTOM w0.141: U5.4 17.44,7.1 17.34,6.99 17.34,6.67 17.34,6.67 17.34,3 17.48,2.86 v1(17.85,2.86)
N1010307: length 2.5
  BOTTOM w0.254: U5.9 14.39,9.14 13.71,8.46 R8.2
N1010387: length 7.2
  TOP w0.254: C13.1 15.91,7.22 15.79,7.33 14.73,7.33 v1(14.43,7.04)
  BOTTOM w0.254: 15.64,6.08 14.68,7.04 v1(14.43,7.04) 14,7.04 R8.1 ; 15.64,6.08 C14.1 ; 15.64,6.08 16.44,6.88 U5.6
N1014561: length 1.3
  TOP w0.508: R7.1 2.63,12.14 2.74,12.03 LED2.2
N1015275: length 1.4
  TOP w0.508: LED1.2 1.52,12.03 1.64,12.15 R6.1
N1041543: length 2.5
  TOP w0.508: U7.3 10.4,3.1 10.48,3.02 R10.2
N1044127: length 2.5
  TOP w0.508: R9.2 10.46,6.46 10.39,6.52 U6.3

## Copper pours and planes (outline as drawn; the poured copper is in the pictures)
GND on TOP: 1,0.26 0.47,0.47 0.26,1 0.26,29 0.47,29.53 1,29.74 9,29.74 9.89,30.11 10.25,31 10.25,39 10.47,39.53 11,39.74 24,39.74 24.53,39.53 24.74,39 24.74,31 25.11,30.11 26,29.74 34,29.74 34.53,29.53 34.74,29 34.74,1 34.53,0.47 34,0.26 ; 6 cut-outs
GND on BOTTOM: 1,0.26 0.47,0.47 0.26,1 0.26,29 0.47,29.53 1,29.74 9,29.74 9.89,30.11 10.25,31 10.25,39 10.47,39.53 11,39.74 24,39.74 24.53,39.53 24.74,39 24.74,31 25.11,30.11 26,29.74 34,29.74 34.53,29.53 34.74,29 34.74,1 34.53,0.47 34,0.26 ; 4 cut-outs
GND on GND02: 1,0.26 0.47,0.47 0.26,1 0.26,29 0.47,29.53 1,29.74 9,29.74 9.89,30.11 10.25,31 10.25,39 10.47,39.53 11,39.74 24,39.74 24.53,39.53 24.74,39 24.74,31 25.11,30.11 26,29.74 34,29.74 34.53,29.53 34.74,29 34.74,1 34.53,0.47 34,0.26
VCC_3V3 on PWR03: 1,0.26 0.47,0.47 0.26,1 0.26,29 0.47,29.53 1,29.74 9,29.74 9.89,30.11 10.25,31 10.25,39 10.47,39.53 11,39.74 24,39.74 24.53,39.53 24.74,39 24.74,31 25.11,30.11 26,29.74 34,29.74 34.53,29.53 34.74,29 34.74,1 34.53,0.47 34,0.26 ; 2 cut-outs

## Text on the board
Ref Des/Silkscreen Top: Z | Y | X | GND | DIO | CLK | 3V3 | SOPHUM FLOW V1
